# Altium PCB PCB1.PcbDoc
Units mm, origin at the board's own origin, x right, y up, seen from the top; angles counter-clockwise.
Board outline 65.66 x 43.81 mm, 2 copper layers (Top Layer, Bottom Layer); 23 components, 19 nets, 68 pads, 0 vias.
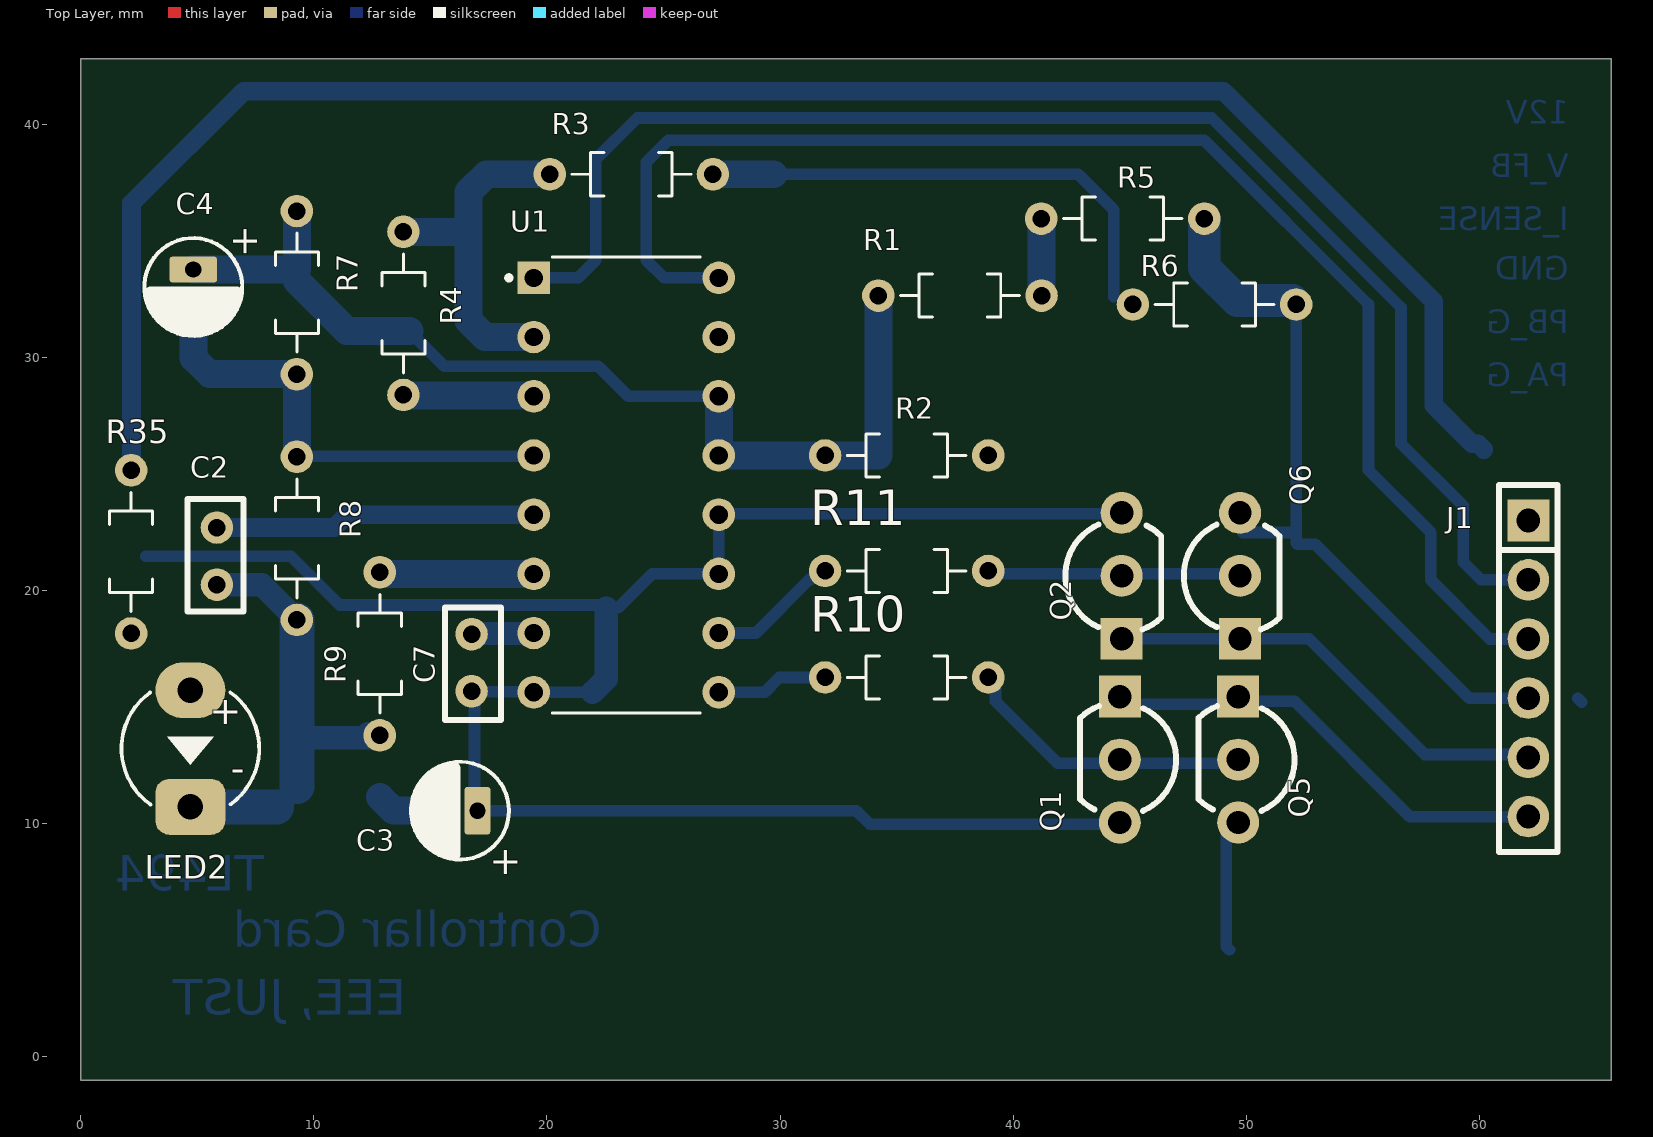
[diagram p0: Top Layer view]
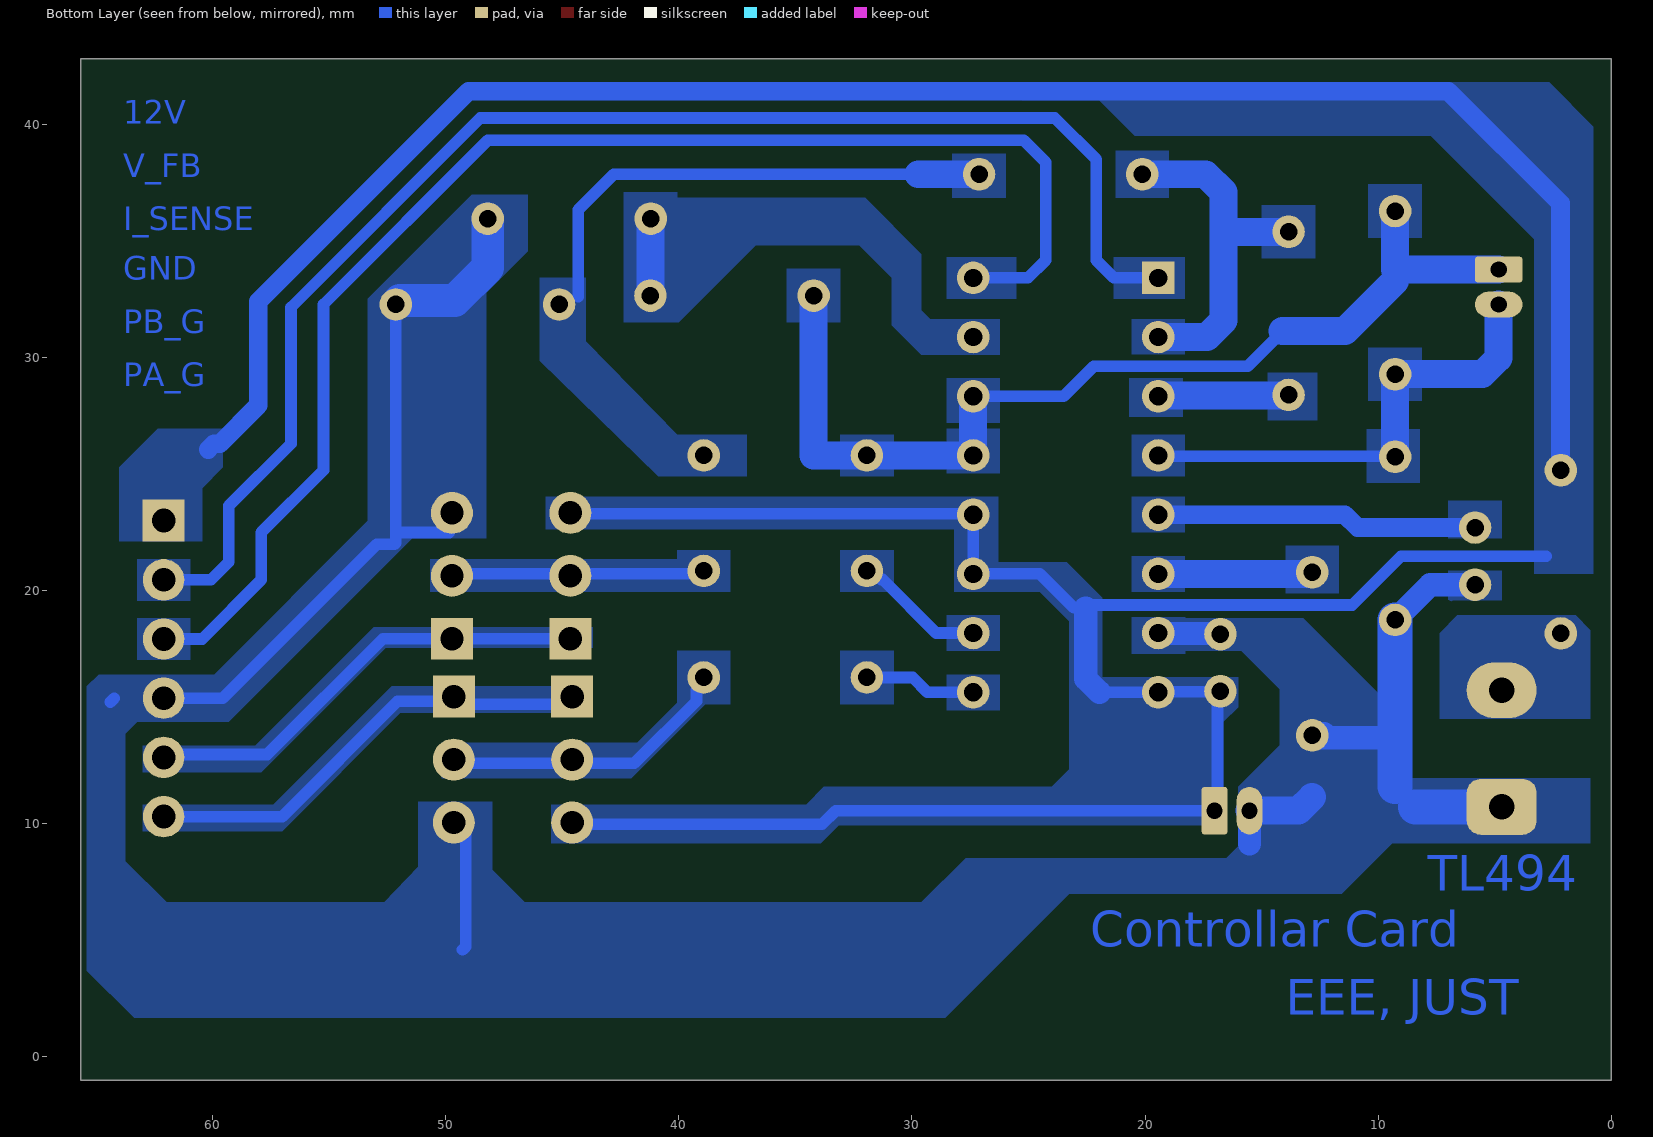
[diagram p1: Bottom Layer view, seen from below]
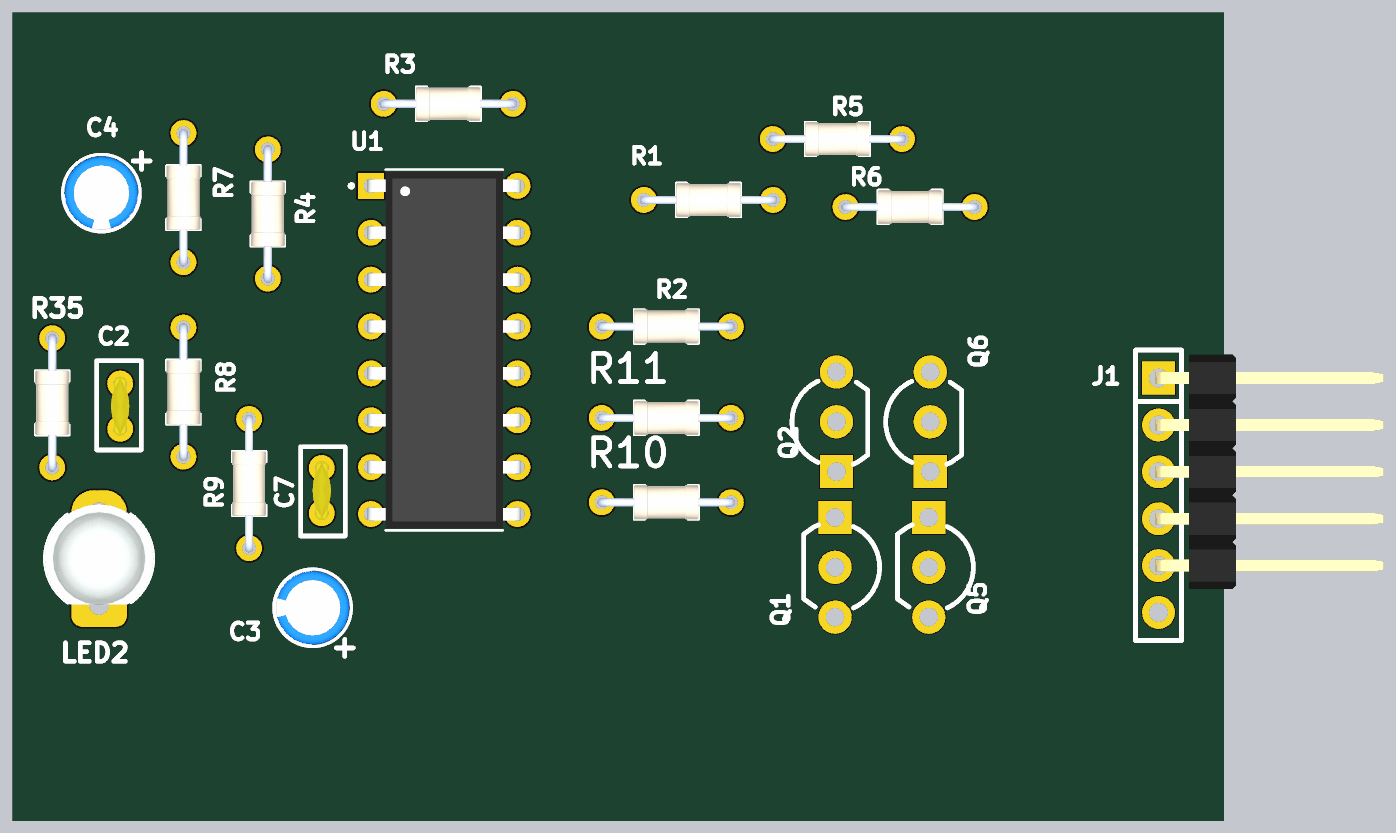
[diagram p2: 3D render of the assembled board from above, using the file's embedded part models]

## Layer stack, top to bottom
Top Solder: solder mask 0.0102, Solder Resist, Dk 3.5
Top Layer: signal copper 0.0356
Dielectric 1: dielectric 0.32, FR-4, Dk 4.8
Bottom Layer: signal copper 0.0356
Bottom Solder: solder mask 0.0102, Solder Resist, Dk 3.5

## Board outline
0,-1.016 0,42.799 65.659,42.799 65.659,-1.016

## Design rules (kind name [scope] priority, off if disabled: settings)
Clearance [All] p1: gap=0.254 ignorepadtopadclearanceinfootprint=FALSE except(0: Arc-Hole Track-Hole SMDPad-Hole THPad-Hole Via-Hole Fill-Hole Poly-Hole Region-Hole Text-Hole)
PlaneConnect [All] p1: planeconnectstyle=Relief reliefexpansion=0.508 reliefentries=4 reliefconductorwidth=0.45 reliefairgap=0.254
PolygonConnect [All] p1: connectstyle=Direct reliefconductorwidth=0.5 reliefentries=4 polygonreliefangle="90 Angle" airgapwidth=0.254
RoutingLayers [All] p1: top layer_v5=FALSE bottom layer_v5=TRUE
RoutingVias [All] p1: holewidth=0.711 width=1.27 viastyle="Through Hole" minholewidth=0.711 minwidth=1.27 maxholewidth=0.711 maxwidth=1.27
SolderMaskExpansion [All] p1: expansion=0.102 istentingtop=FALSE
Width [All] p1: maxlimit=3 minlimit=0.4 preferedwidth=0.5
28 further rules are at their usual default settings.

## Components (designator, comment, footprint, x,y, rotation, side; value= is the part's Value field where it differs from the comment)
C2 "1NFCER" CAP-CER-2.54 5.842,21.463 r90 top
C3 "100UF25V" "CAP LS-1.5mm D4 H5" 17.018,10.541 r180 top
C4 "2.5UF" "CAP LS-1.5mm D4 H5" 4.826,33.758 r270 top
C7 "1UFCER" CAP-CER-2.54 16.764,16.891 r270 top
J1 "HDR6Pin" HDR-TH_6P-P2.54-V-F 62.103,16.637 r270 top
LED2 "LED White TH" "LED_5mm P5MM WHITE" 4.699,13.208 r90 top
Q1 "SS8050" TO-92 44.528,12.65 r270 top
Q2 "SS8050" TO-92 44.704,20.701 r90 top
Q5 "SS8550" TO-92 49.608,12.65 r270 top
Q6 "SS8550" TO-92 49.784,20.701 r90 top
R1 "4K" RES-TH-7mm 37.719,32.639 r180 top
R2 "5K" RES-TH-7mm 35.433,25.781 r180 top
R3 "500R" RES-TH-7mm 23.622,37.846 r180 top
R4 "500K" RES-TH-7mm 13.843,31.877 r270 top
R5 "1K" RES-TH-7mm 44.704,35.941 r180 top
R6 "5K" RES-TH-7mm 48.641,32.258 r180 top
R7 "9.1K" RES-TH-7mm 9.271,32.766 r90 top
R8 "1K" RES-TH-7mm 9.271,22.225 r90 top
R9 "25K" RES-TH-7mm 12.827,17.272 r90 top
R10 "1K" RES-TH-7mm 35.433,16.256 r0 top
R11 "1K" RES-TH-7mm 35.433,20.828 r180 top
R35 "1K" RES-TH-7mm 2.159,21.646 r90 top
U1 "TL494" DIP-16 23.401,24.511 r0 top

## Footprints (in the part's own frame and the unit in brackets; to place one, negate y for a bottom-side part, rotate by r counter-clockwise, add the part's x,y. Pads: shape width x height; smd on the part's side, far side on the other; paste and mask are expansions set on the pad)
"CAP LS-1.5mm D4 H5" [mm]
  rrect20% 1.1x2.032 hole 0.7: 1(0,0)
  oval 1.1x2.032 hole 0.7: 2(1.5,0)
  silkscreen extent -1.35,-2.1 2.85,2.1, body extent -1.25,-2 2.74,2, height 5
CAP-CER-2.54 [mm]
  round 1.397 hole 0.75: 1(-1.225,0) 2(1.225,0)
  silkscreen extent -2.37,-1.14 2.46,1.27, body extent -1.62,-0.5 1.62,0.5, height 4.99
DIP-16 [mm]
  rect 1.397x1.397 hole 0.78 mask+0.102: 1(-3.97,8.89)
  round 1.397 hole 0.78 mask+0.102: 2(-3.97,6.35) 3(-3.97,3.81) 4(-3.97,1.27) 5(-3.97,-1.27) 6(-3.97,-3.81) 7(-3.97,-6.35) 8(-3.97,-8.89) 9(3.97,-8.89) 10(3.97,-6.35) 11(3.97,-3.81) 12(3.97,-1.27) 13(3.97,1.27) 14(3.97,3.81) 15(3.97,6.35) 16(3.97,8.89)
  silkscreen extent -5.13,-9.77 3.17,9.77, body extent -4.15,-9.65 4.15,9.65, height 5.08
HDR-TH_6P-P2.54-V-F [mil]
  rect 70.87x70.87 hole 40.16 paste+0 mask+2: 1(-250,0)
  round 70 hole 40.16 paste+0 mask+2: 2(-150,0) 3(-50,0) 4(50,0) 5(150,0) 6(250,0)
  silkscreen extent -310,-49 310,49, body extent -300,-7 200,480, height 128
"LED_5mm P5MM WHITE" [mm] "LED_5mm P5MM WHITE"
  rrect50% 2.4x3 hole 1.1: 1(-2.5,0)
  oval 2.4x3 hole 1.1: 2(2.5,0)
  silkscreen extent -2.41,-2.95 2.41,2.95, body extent -2.49,-2.94 2.96,2.94, height 12.6
RES-TH-7mm [mm]
  round 1.397 hole 0.75: 1(-3.5,0) 2(3.5,0)
  silkscreen extent -2.55,-0.92 2.55,0.92, body extent -3.72,-0.92 3.72,0.92, height 1.84
TO-92 [mm]
  rect 1.8x1.8 hole 1 paste+0 mask+0.051: 1(-2.783,0.049)
  round 1.8 hole 1 paste+0 mask+0.051: 2(-0.083,0.049) 3(2.617,0.049)
  silkscreen extent -2.38,-1.65 2.12,2.46

## Part data
C2: "CAP: CER 1UF 50V X7R 1206", LCSC Part #=C1848, Unit Price=0.0104
C3: "CAP TH AL: 100U 25V", LCSC Part #=C43351, Unit Price=0.0057
C4: "CAP TH AL: 2.5UF", LCSC Part #=C43351, Unit Price=0.0057
C7: "CAP: CER 1UF 50V", LCSC Part #=C1848, Unit Price=0.0104
J1: "HEADER: 1*6P Male"
LED2: "LED: White, Through Hole, T-1 3/4 (5mm), 30 mA, 2.1V / LS-5MM", LCSC Part #=C7470709
Q1 Q2: "Transistor: 25V 300mW 120@100mA,1V 1.5A NPN SOT-23", LCSC Part #=C59205, Unit Price=0.0048
Q5 Q6: "Transistor: 25V 200mW 120@100mA,1V 1.5A PNP SOT-23 EVVO", LCSC Part #=C59205, Unit Price=0.0048
R1: "RES TH: 4K"
R2 R6: "RES TH: 5K"
R3: "RES TH: 500R"
R4: "RES TH: 500K"
R5 R8 R10 R11 R35: "RES TH: 1K"
R7: "RES TH: 9.1K"
R9: "RES TH: 25K"
U1: "IC: PWM Controllar"

## Nets (pads, with @x,y where several pads share a name; then routed paths per layer and width w, separated by ;. In a path a pad name is that pad's centre, name@x,y a point inside that pad or via, vN(x,y) a via of type N, cw(c..) or ccw(c..) an arc to the next point about the centre after c; other vN are vias at no path point)
2IN-: R1.1 R5.2 U1.15 | length 3.3
  Bottom Layer w0.5: R5.2 R5.2@41.219,35.926
  Bottom Layer w1.2: R1.1 R5.2@41.219,35.926
+12: C3.1 C7.2 J1.1 Q1.3 Q2.3 R35.2 U1.8 U1.11 U1.12 | length 168
  Bottom Layer w0.5: 2.794,21.463 9.017,21.463 11.117,19.363 22.42,19.363 22.543,19.241 23.05,19.241 24.511,20.701 U1.11 U1.12 27.409,23.279 44.617,23.279 Q2.3 ; C7.2 C7.2@16.786,15.643 ; 21.957,15.621 U1.8 19.409,15.643 C7.2@16.786,15.643 ; Q1.3@44.119,9.956 33.859,9.956 33.274,10.541 C3.1 16.891,10.668 16.891,15.539 C7.2@16.786,15.643
  Bottom Layer w0.8: R35.2 2.178,25.165 2.178,36.595 6.985,41.402 49.022,41.402 58.039,32.385 58.039,27.94 59.69,26.289 59.944,26.289 60.198,26.035
  Bottom Layer w1: 21.957,15.621 22.543,16.207 22.543,19.241
  Bottom Layer w1.3: R35.2@2.14,25.127 R35.2
DTC: C4.2 R7.1 R8.2 U1.4 | length 20.8
  Bottom Layer w0.5: R8.2 9.327,25.781 9.355,25.753 19.403,25.753 U1.4
  Bottom Layer w1.2: C4.2 4.826,29.972 5.532,29.266 R7.1 R8.2
GND: C2.1 C3.2 C7.1 J1.4 LED2.1 Q5.3 Q6.3 R5.1 R6.1 R8.1 R9.1 U1.7 | length 63
  Bottom Layer w0.5: Q5.3@49.15,9.956 49.15,4.698 49.28,4.568 ; Q6.3@49.844,22.479 52.141,22.479 ; R6.1@51.969,32.43 R6.1 52.141,22.479 ; J1.4 59.563,15.367 52.959,21.971 52.197,21.971 52.141,22.027 52.141,22.479 ; 64.223,15.367 64.389,15.201
  Bottom Layer w1: C2.1 7.758,20.238 R8.1 ; 9.525,13.676 12.45,13.676 R9.1@12.47,13.696 ; R9.1@12.318,13.848 12.751,13.848 R9.1 ; 15.518,9.12 C3.2 ; C7.1 16.787,18.139 19.409,18.139 U1.7
  Bottom Layer w1.2: 12.827,11.127 13.413,10.541 C3.2
  Bottom Layer w1.4: R5.1 48.204,33.838 49.612,32.43 R6.1@51.969,32.43
  Bottom Layer w1.5: LED2.1 8.392,10.708 ; 9.271,11.587 R8.1
I_SENSE: J1.3 U1.16 | length 60.1
  Bottom Layer w0.5: U1.16 25.019,33.401 24.257,34.163 24.257,38.354 25.205,39.302 48.201,39.302 55.245,32.258 55.245,25.146 57.912,22.479 57.912,20.447 60.452,17.907 J1.3
NetC2_2: C2.2 U1.5 | length 13.8
  Bottom Layer w0.8: C2.2 10.877,22.688 11.43,23.241 U1.5
NetC4_1: C4.1 R1.2 R2.2 R7.2 U1.13 U1.14 | length 44.1
  Bottom Layer w0.5: 9.271,33.274 9.271,33.758 ; 14.097,31.115 15.599,29.613 22.203,29.613 23.495,28.321 U1.14 ; R1.2 R1.2@34.391,32.811
  Bottom Layer w1.2: C4.1 9.271,33.758 R7.2 ; 9.271,33.274 11.43,31.115 14.097,31.115 ; U1.14 U1.13 34.219,25.781 R1.2
NetLED2_2: LED2.2 R35.1
NetQ1_2: Q1.2 Q5.2 R10.2 | length 12.2
  Bottom Layer w0.5: R10.2 38.933,16.013 39.243,15.703 39.243,15.24 41.91,12.573 44.07,12.573 Q5.2@49.15,12.573
NetQ2_2: Q2.2 Q6.2 R11.1 | length 10.9
  Bottom Layer w0.5: R11.1@38.943,20.838 39.07,20.711 44.562,20.711 Q2.2 ; Q2.2@44.704,20.701 Q6.2@49.784,20.701
NetR2_1: R2.1 R3.1 R6.2 | length 21.6
  Bottom Layer w0.5: 29.718,37.846 42.799,37.846 44.323,36.322 44.323,32.584
  Bottom Layer w1.2: R3.1 29.718,37.846
NetR3_2: R3.2 R4.1 U1.2 | length 15.2
  Bottom Layer w1.2: R4.1 16.637,35.377 ; U1.2 17.34,30.861 16.637,31.564 16.637,35.377 ; R3.2 17.399,37.846 16.637,37.084 16.637,35.377
NetR4_2: R4.2 U1.3 | length 5.6
  Bottom Layer w0.5: R4.2 R4.2@13.871,28.349 ; U1.3@19.403,28.349 U1.3
  Bottom Layer w1.2: R4.2@13.871,28.349 U1.3@19.403,28.349
NetR9_2: R9.2 U1.6 | length 6.6
  Bottom Layer w0.5: R9.2 12.983,20.772 R9.2@13.068,20.688
  Bottom Layer w1.2: R9.2@13.068,20.688 U1.6@19.418,20.688
PULSE_A: R10.1 U1.9 | length 4.8
  Bottom Layer w0.5: U1.9 29.337,15.621 29.972,16.256 R10.1
PULSE_A_G: J1.6 Q1.1 Q5.1 | length 20.2
  Bottom Layer w0.5: Q1.1@44.119,15.356 44.362,15.113 48.956,15.113 Q5.1@49.199,15.356 ; Q5.1@49.199,15.24 52.07,15.24 57.023,10.287 J1.6
PULSE_B: R11.2 U1.10 | length 5.7
  Bottom Layer w0.5: U1.10 28.956,18.161 31.254,20.459 31.321,20.459 31.69,20.828 R11.2
PULSE_B_G: J1.5 Q2.1 Q6.1 | length 19.6
  Bottom Layer w0.5: Q2.1 Q6.1 52.694,17.918 57.658,12.954 61.976,12.954 J1.5
V_FB: J1.2 U1.1 | length 61.1
  Bottom Layer w0.5: U1.1 21.336,33.401 22.098,34.163 22.098,38.481 23.876,40.259 48.514,40.259 56.642,32.131 56.642,26.289 59.309,23.622 59.309,21.209 60.071,20.447 J1.2

## Polygon pours and split planes (outlines as drawn)
NetR4_2 on Bottom Layer "NETR4_2_L02_P027" (solid, pour order 27): 12.603,29.337 14.732,29.337 14.732,27.293 12.603,27.293
+12 on Bottom Layer (solid, pour order 60): 3.302,35.052 7.747,39.497 20.447,39.497 21.971,41.021 25.273,41.021 25.273,41.783 2.667,41.783 0.762,39.878 0.762,20.701 3.302,20.701 3.302,30.734
+12 on Bottom Layer "Bottom Layer-+12" (solid, pour order 58): 16.002,14.986 16.637,14.351 16.637,9.906 33.147,9.906 33.909,9.144 45.466,9.144 45.466,10.795 34.544,10.795 33.782,11.557 24.003,11.557 23.241,12.319 23.241,18.669 24.511,19.939 28.194,19.939 28.194,22.606 45.72,22.606 45.72,24.003 26.289,24.003 26.289,21.209 23.368,21.209 21.844,19.685 21.844,16.256 16.002,16.256
NetLED2_2 on Bottom Layer "NETLED2_2_L02_P004" (solid, pour order 4): 7.366,14.478 7.366,18.161 6.604,18.923 1.524,18.923 0.889,18.288 0.889,14.478
NetQ2_2 on Bottom Layer "Bottom Layer-NetQ2_2" (solid, pour order 59): 37.79,19.939 50.673,19.939 50.673,21.336 40.076,21.336 40.076,21.717 37.79,21.717
NetQ1_2 on Bottom Layer "NETQ1_2_L02_P053" (solid, pour order 53): 50.165,13.462 50.165,11.938 42.037,11.938 38.735,15.24 40.005,15.24 41.783,13.462
PULSE_A_G on Bottom Layer "PULSE_A_G_L02_P052" (solid, pour order 52): 62.992,10.795 62.992,9.652 57.023,9.652 51.943,14.732 43.688,14.732 43.688,15.875 52.324,15.875 57.404,10.795
NetC2_2 on Bottom Layer "NETC2_2_L02_P030" (solid, pour order 30): 4.699,23.831 6.985,23.831 6.985,22.225 4.699,22.225
GND on Bottom Layer "GND_L02_P031" (solid, pour order 31): 4.699,20.828 6.985,20.828 6.985,19.095 4.699,19.095
PULSE_B_G on Bottom Layer "PULSE_B_G_L02_P050" (solid, pour order 50): 43.688,18.415 53.086,18.415 58.166,13.335 62.992,13.335 62.992,12.192 57.912,12.192 52.578,17.526 43.688,17.526
NetR4_2 on Bottom Layer "NETR4_2_L02_P046" (solid, pour order 46): 18.391,29.083 20.677,29.083 20.677,27.432 18.391,27.432
NetR2_1 on Bottom Layer "NETR2_1_L02_P048" (solid, pour order 48): 45.974,29.845 40.894,24.892 40.076,24.892 40.076,26.67 43.998,30.675 43.998,33.401 45.974,33.401
NetR2_1 on Bottom Layer "NETR2_1_L02_P042" (solid, pour order 42): 43.998,33.401 45.974,33.401 45.974,31.115 43.998,31.115
GND on Bottom Layer "GND_L02_P006" (solid, pour order 6): 29.591,6.604 27.686,8.509 16.51,8.509 16.002,9.017 16.002,11.557 14.222,13.337 14.222,15.746 15.875,17.399 19.939,17.399 19.939,18.796 13.208,18.796 9.398,14.986 9.398,9.144 11.557,6.985 23.241,6.985 28.575,1.651 63.373,1.651 65.405,3.683 65.405,15.875 64.897,16.383 59.944,16.383 53.34,22.987 53.34,32.512 48.895,36.957 46.482,36.957 46.482,34.544 48.26,32.766 48.26,22.225 51.435,22.225 59.309,14.351 63.246,14.351 63.754,13.843 63.754,8.382 61.976,6.604 52.642,6.604 51.181,8.128 51.181,10.922 48.006,10.922 48.006,8.001 46.609,6.604
NetR9_2 on Bottom Layer "NETR9_2_L02_P013" (solid, pour order 13): 18.288,21.463 20.574,21.463 20.574,19.939 18.288,19.939
GND on Bottom Layer "GND_L02_P014" (solid, pour order 14): 18.277,18.923 20.563,18.923 20.563,17.272 18.277,17.272
2IN- on Bottom Layer "2IN-_L02_P047" (solid, pour order 47): 32.258,34.798 30.861,33.401 30.861,31.369 29.591,30.099 28.514,30.099 28.514,31.623 29.21,31.623 29.591,32.004 29.591,34.417 32.004,36.83 42.362,36.83 42.362,31.496 40.005,31.496 36.703,34.798
I_SENSE on Bottom Layer "I_SENSE_L02_P044" (solid, pour order 44): 60.96,18.796 63.246,18.796 63.246,17.018 60.96,17.018
V_FB on Bottom Layer "V_FB_L02_P043" (solid, pour order 43): 60.96,21.336 63.246,21.336 63.246,19.558 60.96,19.558
2IN- on Bottom Layer "2IN-_L02_P041" (solid, pour order 41): 40.076,37.069 42.362,37.069 42.362,34.783 40.076,34.783
2IN- on Bottom Layer "2IN-_L02_P040" (solid, pour order 40): 40.076,33.782 42.362,33.782 42.362,31.496 40.076,31.496
NetC4_1 on Bottom Layer "NETC4_1_L02_P039" (solid, pour order 39): 33.076,33.782 35.362,33.782 35.362,31.496 33.076,31.496
NetC4_1 on Bottom Layer "NETC4_1_L02_P038" (solid, pour order 38): 30.79,26.67 33.076,26.67 33.076,24.892 30.79,24.892
NetR2_1 on Bottom Layer "NETR2_1_L02_P037" (solid, pour order 37): 37.084,26.67 40.076,26.67 40.076,24.892 37.084,24.892
PULSE_B on Bottom Layer "PULSE_B_L02_P035" (solid, pour order 35): 30.79,21.717 33.076,21.717 33.076,19.939 30.79,19.939
PULSE_A on Bottom Layer "PULSE_A_L02_P034" (solid, pour order 34): 30.79,17.399 33.076,17.399 33.076,15.113 30.79,15.113
NetQ1_2 on Bottom Layer "NETQ1_2_L02_P033" (solid, pour order 33): 37.79,17.399 40.076,17.399 40.076,15.113 37.79,15.113
NetR9_2 on Bottom Layer "NETR9_2_L02_P032" (solid, pour order 32): 11.684,21.915 13.97,21.915 13.97,19.629 11.684,19.629
DTC on Bottom Layer "DTC_L02_P029" (solid, pour order 29): 8.212,26.896 10.498,26.896 10.498,24.61 8.212,24.61
DTC on Bottom Layer "DTC_L02_P028" (solid, pour order 28): 8.128,30.409 10.414,30.409 10.414,28.123 8.128,28.123
NetR3_2 on Bottom Layer "NETR3_2_L02_P026" (solid, pour order 26): 12.7,36.52 14.986,36.52 14.986,34.234 12.7,34.234
NetC4_1 on Bottom Layer "NETC4_1_L02_P025" (solid, pour order 25): 8.128,37.409 10.414,37.409 10.414,35.123 8.128,35.123
NetR2_1 on Bottom Layer "NETR2_1_L02_P024" (solid, pour order 24): 25.979,38.735 28.265,38.735 28.265,36.83 25.979,36.83
NetR3_2 on Bottom Layer "NETR3_2_L02_P023" (solid, pour order 23): 18.979,38.862 21.265,38.862 21.265,36.83 18.979,36.83
NetR3_2 on Bottom Layer "NETR3_2_L02_P022" (solid, pour order 22): 18.288,31.623 20.574,31.623 20.574,30.099 18.288,30.099
V_FB on Bottom Layer "V_FB_L02_P021" (solid, pour order 21): 18.288,34.29 21.336,34.29 21.336,32.512 18.288,32.512
I_SENSE on Bottom Layer "I_SENSE_L02_P020" (solid, pour order 20): 25.527,34.29 28.514,34.29 28.514,32.512 25.527,32.512
2IN- on Bottom Layer "2IN-_L02_P019" (solid, pour order 19): 26.228,31.623 28.514,31.623 28.514,30.099 26.228,30.099
NetC4_1 on Bottom Layer "NETC4_1_L02_P018" (solid, pour order 18): 26.228,29.083 28.514,29.083 28.514,27.178 26.228,27.178
NetC4_1 on Bottom Layer "NETC4_1_L02_P017" (solid, pour order 17): 26.228,26.924 28.514,26.924 28.514,25.019 26.228,25.019
PULSE_B on Bottom Layer "PULSE_B_L02_P016" (solid, pour order 16): 26.228,18.923 28.514,18.923 28.514,17.399 26.228,17.399
PULSE_A on Bottom Layer "PULSE_A_L02_P015" (solid, pour order 15): 26.228,16.383 28.514,16.383 28.514,14.859 26.228,14.859
NetC2_2 on Bottom Layer "NETC2_2_L02_P012" (solid, pour order 12): 18.288,24.003 20.574,24.003 20.574,22.479 18.288,22.479
DTC on Bottom Layer "DTC_L02_P011" (solid, pour order 11): 18.288,26.67 20.574,26.67 20.574,24.892 18.288,24.892
GND on Bottom Layer "GND_L02_P005" (solid, pour order 5): 0.889,11.938 10.033,11.938 10.033,9.144 0.889,9.144
+12 on Bottom Layer "+12_L02_P001" (solid, pour order 1): 64.008,22.098 64.008,25.273 62.357,26.924 59.563,26.924 59.563,25.273 60.452,24.384 60.452,22.098

## Other copper
Bottom Layer:
  text "12V" at 63.843,40.005 h1
  text "V_FB" at 63.843,37.719 h1
  text "I_SENSE" at 63.843,35.433 h1
  text "GND" at 63.843,33.314 h1
  text "PB_G" at 63.843,31.028 h1
  text "PA_G" at 63.843,28.742 h1
  text "TL494" at 7.879,7.112 h1.52
  text "Controllar Card" at 22.352,4.699 h1.52
  text "EEE, JUST" at 13.973,1.778 h1.52

## Silkscreen, mask and mechanical layers (free items; w line width, h text height)
Mechanical 1:
  the board outline again, w0.254

## Text inside footprints (layer, text, board x,y; h text height)
C3: Top Overlay "+" at 18.923,8.836 h1.2 r180
C4: Top Overlay "+" at 6.531,35.663 h1.2 r270
LED2: Top Overlay "-" at 7.024,12.683 h1.2 r180; Top Overlay "+" at 6.899,15.283 h1.2 r180